# EAGLE board RN41-Panel-v15 (EAGLE 6.4)
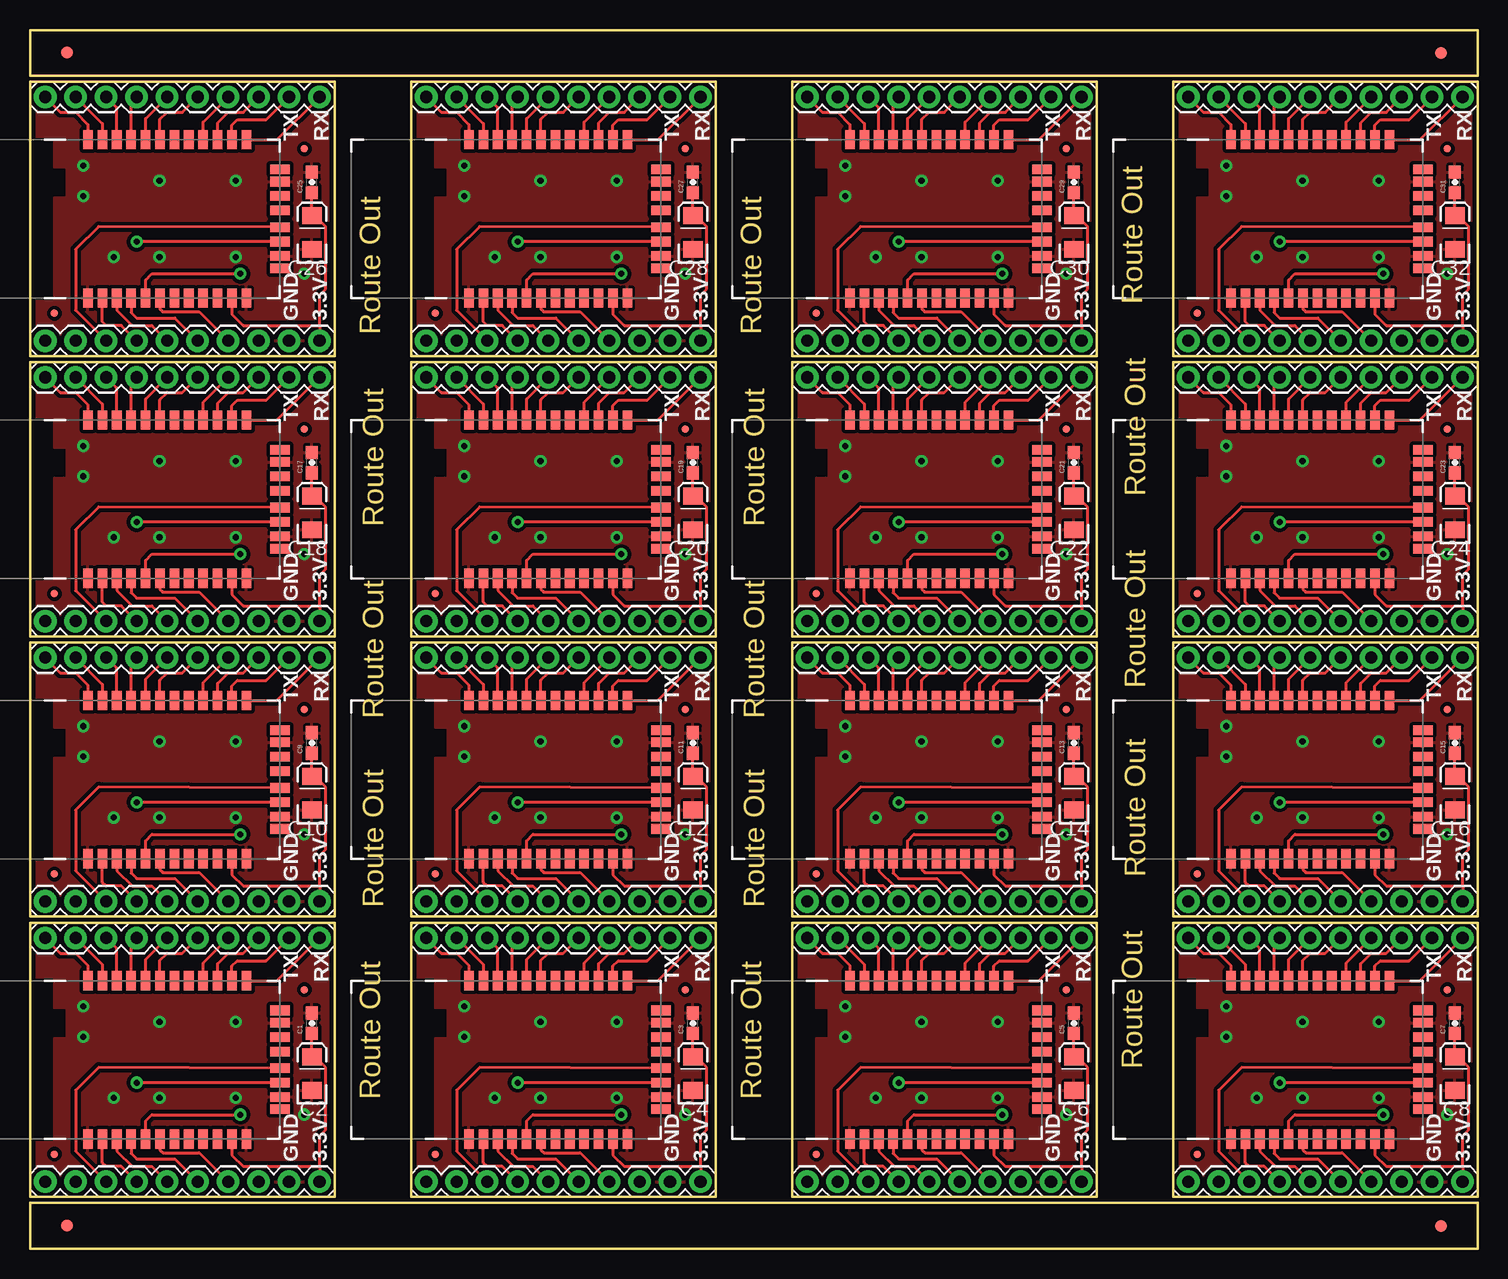
[diagram p0: board, top side]
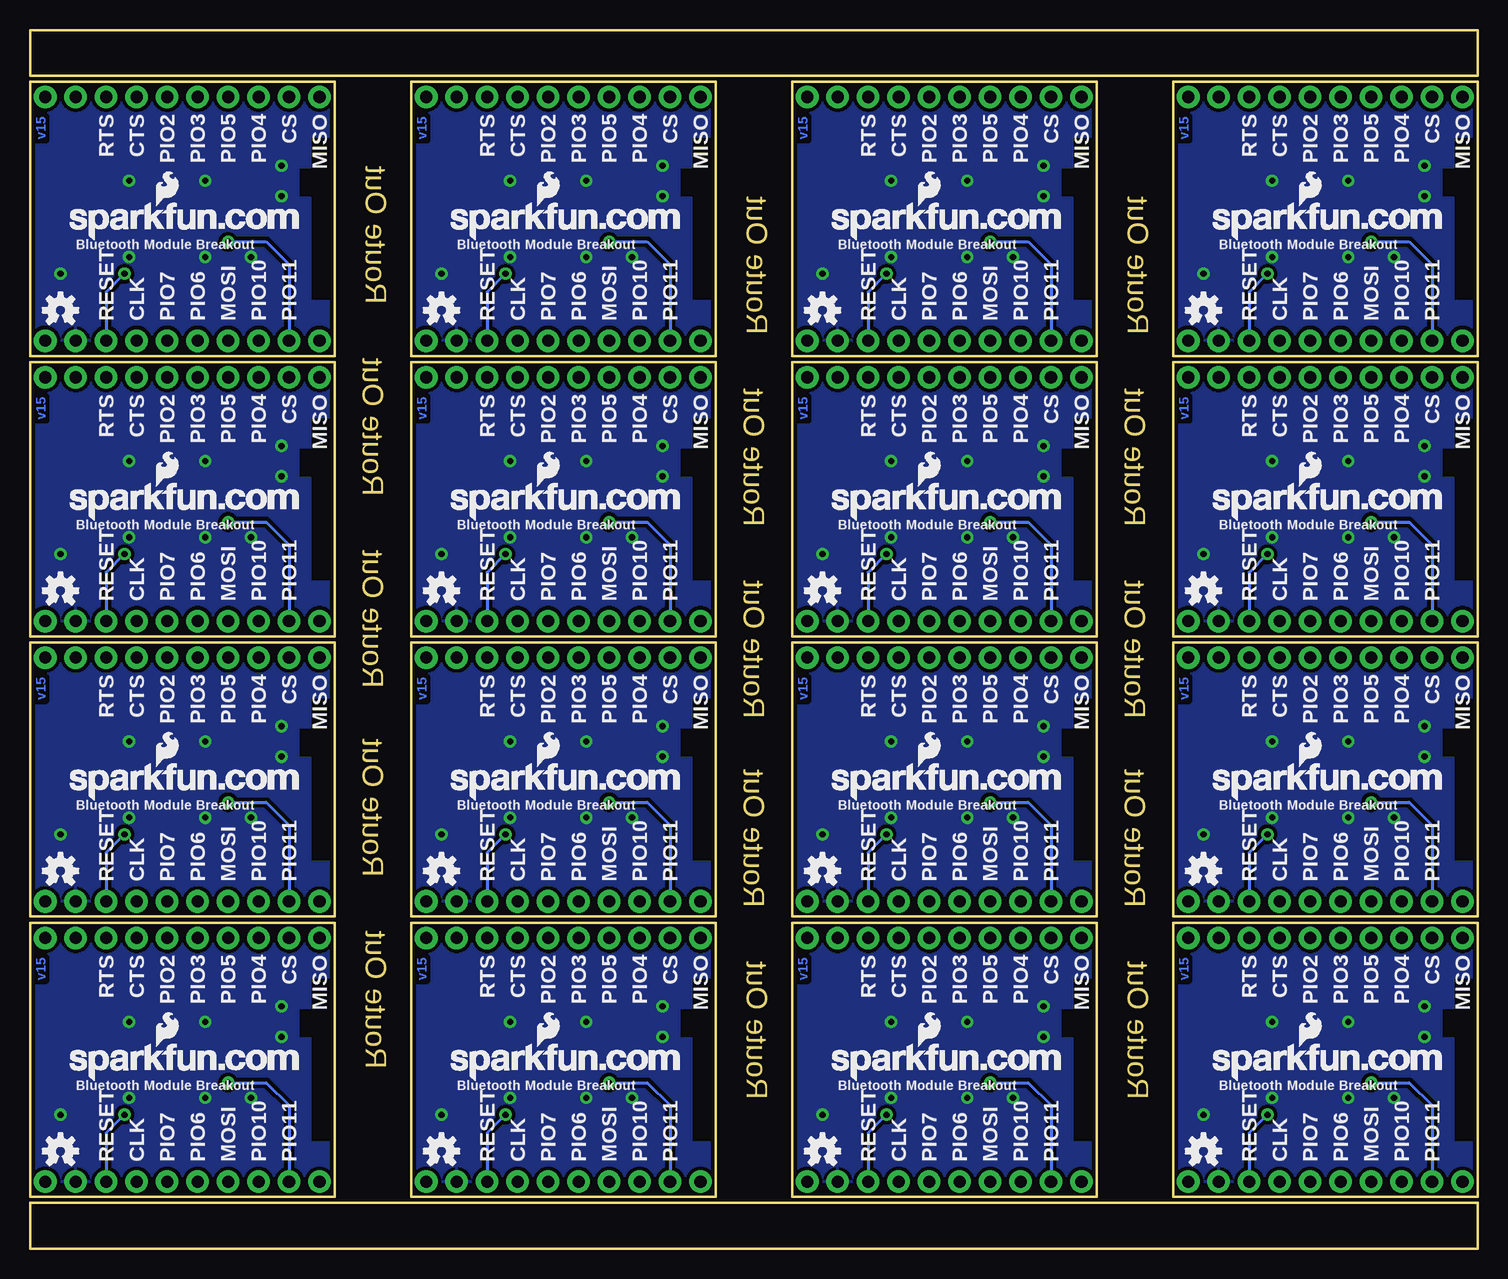
[diagram p1: board, bottom side, seen from below]

Size 120.65 x 101.6 mm. Coordinates in mm from the lower left corner, seen from the top.
Outline: 0,4.32 25.4,4.32 25.4,27.18 0,27.18 0,4.32
Outline: 31.75,4.32 57.15,4.32 57.15,27.18 31.75,27.18 31.75,4.32
Outline: 63.5,4.32 88.9,4.32 88.9,27.18 63.5,27.18 63.5,4.32
Outline: 95.25,4.32 120.65,4.32 120.65,27.18 95.25,27.18 95.25,4.32
Outline: 0,27.69 25.4,27.69 25.4,50.55 0,50.55 0,27.69
Outline: 31.75,27.69 57.15,27.69 57.15,50.55 31.75,50.55 31.75,27.69
Outline: 63.5,27.69 88.9,27.69 88.9,50.55 63.5,50.55 63.5,27.69
Outline: 95.25,27.69 120.65,27.69 120.65,50.55 95.25,50.55 95.25,27.69
Outline: 0,51.05 25.4,51.05 25.4,73.91 0,73.91 0,51.05
Outline: 31.75,51.05 57.15,51.05 57.15,73.91 31.75,73.91 31.75,51.05
Outline: 63.5,51.05 88.9,51.05 88.9,73.91 63.5,73.91 63.5,51.05
Outline: 95.25,51.05 120.65,51.05 120.65,73.91 95.25,73.91 95.25,51.05
Outline: 0,74.42 25.4,74.42 25.4,97.28 0,97.28 0,74.42
Outline: 31.75,74.42 57.15,74.42 57.15,97.28 31.75,97.28 31.75,74.42
Outline: 63.5,74.42 88.9,74.42 88.9,97.28 63.5,97.28 63.5,74.42
Outline: 95.25,74.42 120.65,74.42 120.65,97.28 95.25,97.28 95.25,74.42
Outline: 0,97.79 120.65,97.79 120.65,101.6 0,101.6 0,97.79
Outline: 0,0 120.65,0 120.65,3.81 0,3.81 0,0
Copper layers (1*16): Top 0.035mm / dielectric 1.5mm / Bottom 0.035mm
Design rules "SparkFun": minimum track width 8mil, minimum drill 20mil, track to track 8mil, track to pad 8mil, pad to pad 8mil, via to via 8mil, smd to smd 8mil, copper to edge 10mil, drill to drill 8mil, minimum pad ring 12mil, minimum via ring 10mil, stop-mask expansion 4mil, vias tented up to drill 25mil, thermal gap 10mil

## Footprints (pad centres in the part's own frame; a part is rotated, then mirrored left to right if it is on the bottom)
0603-CAP = smd 1.1 x 1: 1 -0.85,0; 2 0.85,0
EIA3216 = smd 1.4 x 1.6: A 1.4,0; C -1.4,0
FIDUCIAL-1X2 = smd 1 x 1: 1 0,0
MICRO-FIDUCIAL = smd 0.635 x 0.635: 1 0,0
1X10 = drill 1.016 pad 1.88: 1 0,0; 2 2.54,0; 3 5.08,0; 4 7.62,0; 5 10.16,0; 6 12.7,0; 7 15.24,0; 8 17.78,0; 9 20.32,0; 10 22.86,0
RN41 = smd 0.8 x 1.6: 1 -6.6,-6.6; 2 -5.4,-6.6; 3 -4.2,-6.6; 4 -3,-6.6; 5 -1.8,-6.6; 6 -0.6,-6.6; 7 0.6,-6.6; 8 1.8,-6.6; 9 3,-6.6; 10 4.2,-6.6; 11 5.4,-6.6; 12 6.6,-6.6; 13 6.6,6.6; 14 5.4,6.6; 15 4.2,6.6; 16 3,6.6; 17 1.8,6.6; 18 0.6,6.6; 19 -0.6,6.6; 20 -1.8,6.6; 21 -3,6.6; 22 -4.2,6.6; 23 -5.4,6.6; 24 -6.6,6.6 | smd 1.6 x 0.8: 28 9.4,3.1; 29 9.4,-3.1; 30 9.4,4.122; 31 9.4,1.9; 32 9.4,0.7; 33 9.4,-0.7; 34 9.4,-1.9; 35 9.4,-4.122

## Placement (x,y rotation side)
C1  0.1uF  [0603-CAP]  23.5,18.8 90 top
C2  10uF  [EIA3216]  23.5,14.61 90 top
C3  0.1uF  [0603-CAP]  55.24,18.8 90 top
C4  10uF  [EIA3216]  55.24,14.61 90 top
C5  0.1uF  [0603-CAP]  87,18.8 90 top
C6  10uF  [EIA3216]  87,14.61 90 top
C7  0.1uF  [0603-CAP]  118.75,18.8 90 top
C8  10uF  [EIA3216]  118.75,14.61 90 top
C9  0.1uF  [0603-CAP]  23.5,42.16 90 top
C10  10uF  [EIA3216]  23.5,37.97 90 top
C11  0.1uF  [0603-CAP]  55.24,42.16 90 top
C12  10uF  [EIA3216]  55.24,37.97 90 top
C13  0.1uF  [0603-CAP]  87,42.16 90 top
C14  10uF  [EIA3216]  87,37.97 90 top
C15  0.1uF  [0603-CAP]  118.75,42.16 90 top
C16  10uF  [EIA3216]  118.75,37.97 90 top
C17  0.1uF  [0603-CAP]  23.5,65.53 90 top
C18  10uF  [EIA3216]  23.5,61.34 90 top
C19  0.1uF  [0603-CAP]  55.24,65.53 90 top
C20  10uF  [EIA3216]  55.24,61.34 90 top
C21  0.1uF  [0603-CAP]  87,65.53 90 top
C22  10uF  [EIA3216]  87,61.34 90 top
C23  0.1uF  [0603-CAP]  118.75,65.53 90 top
C24  10uF  [EIA3216]  118.75,61.34 90 top
C25  0.1uF  [0603-CAP]  23.5,88.9 90 top
C26  10uF  [EIA3216]  23.5,84.71 90 top
C27  0.1uF  [0603-CAP]  55.24,88.9 90 top
C28  10uF  [EIA3216]  55.24,84.71 90 top
C29  0.1uF  [0603-CAP]  87,88.9 90 top
C30  10uF  [EIA3216]  87,84.71 90 top
C31  0.1uF  [0603-CAP]  118.75,88.9 90 top
C32  10uF  [EIA3216]  118.75,84.71 90 top
E$1  [FIDUCIAL-1X2]  117.58,99.67 270 top
E$2  [FIDUCIAL-1X2]  3.07,99.72 90 top
E$3  [FIDUCIAL-1X2]  3.07,1.93 90 top
E$4  [FIDUCIAL-1X2]  117.58,1.88 270 top
FID1  FIDUCIALUFIDUCIAL  [MICRO-FIDUCIAL]  22.86,21.59 0 top
FID2  FIDUCIALUFIDUCIAL  [MICRO-FIDUCIAL]  2.03,7.87 0 top
FID3  FIDUCIALUFIDUCIAL  [MICRO-FIDUCIAL]  54.61,21.59 0 top
FID4  FIDUCIALUFIDUCIAL  [MICRO-FIDUCIAL]  33.78,7.87 0 top
FID5  FIDUCIALUFIDUCIAL  [MICRO-FIDUCIAL]  86.36,21.59 0 top
FID6  FIDUCIALUFIDUCIAL  [MICRO-FIDUCIAL]  65.53,7.87 0 top
FID7  FIDUCIALUFIDUCIAL  [MICRO-FIDUCIAL]  118.11,21.59 0 top
FID8  FIDUCIALUFIDUCIAL  [MICRO-FIDUCIAL]  97.28,7.87 0 top
FID9  FIDUCIALUFIDUCIAL  [MICRO-FIDUCIAL]  22.86,44.96 0 top
FID10  FIDUCIALUFIDUCIAL  [MICRO-FIDUCIAL]  2.03,31.24 0 top
FID11  FIDUCIALUFIDUCIAL  [MICRO-FIDUCIAL]  54.61,44.96 0 top
FID12  FIDUCIALUFIDUCIAL  [MICRO-FIDUCIAL]  33.78,31.24 0 top
FID13  FIDUCIALUFIDUCIAL  [MICRO-FIDUCIAL]  86.36,44.96 0 top
FID14  FIDUCIALUFIDUCIAL  [MICRO-FIDUCIAL]  65.53,31.24 0 top
FID15  FIDUCIALUFIDUCIAL  [MICRO-FIDUCIAL]  118.11,44.96 0 top
FID16  FIDUCIALUFIDUCIAL  [MICRO-FIDUCIAL]  97.28,31.24 0 top
FID17  FIDUCIALUFIDUCIAL  [MICRO-FIDUCIAL]  22.86,68.33 0 top
FID18  FIDUCIALUFIDUCIAL  [MICRO-FIDUCIAL]  2.03,54.61 0 top
FID19  FIDUCIALUFIDUCIAL  [MICRO-FIDUCIAL]  54.61,68.33 0 top
FID20  FIDUCIALUFIDUCIAL  [MICRO-FIDUCIAL]  33.78,54.61 0 top
FID21  FIDUCIALUFIDUCIAL  [MICRO-FIDUCIAL]  86.36,68.33 0 top
FID22  FIDUCIALUFIDUCIAL  [MICRO-FIDUCIAL]  65.53,54.61 0 top
FID23  FIDUCIALUFIDUCIAL  [MICRO-FIDUCIAL]  118.11,68.33 0 top
FID24  FIDUCIALUFIDUCIAL  [MICRO-FIDUCIAL]  97.28,54.61 0 top
FID25  FIDUCIALUFIDUCIAL  [MICRO-FIDUCIAL]  22.86,91.69 0 top
FID26  FIDUCIALUFIDUCIAL  [MICRO-FIDUCIAL]  2.03,77.98 0 top
FID27  FIDUCIALUFIDUCIAL  [MICRO-FIDUCIAL]  54.61,91.69 0 top
FID28  FIDUCIALUFIDUCIAL  [MICRO-FIDUCIAL]  33.78,77.98 0 top
FID29  FIDUCIALUFIDUCIAL  [MICRO-FIDUCIAL]  86.36,91.69 0 top
FID30  FIDUCIALUFIDUCIAL  [MICRO-FIDUCIAL]  65.53,77.98 0 top
FID31  FIDUCIALUFIDUCIAL  [MICRO-FIDUCIAL]  118.11,91.69 0 top
FID32  FIDUCIALUFIDUCIAL  [MICRO-FIDUCIAL]  97.28,77.98 0 top
JP1  [1X10]  24.13,5.59 180 top
JP2  [1X10]  1.27,25.91 0 top
JP3  [1X10]  55.88,5.59 180 top
JP4  [1X10]  33.02,25.91 0 top
JP5  [1X10]  87.63,5.59 180 top
JP6  [1X10]  64.77,25.91 0 top
JP7  [1X10]  119.38,5.59 180 top
JP8  [1X10]  96.52,25.91 0 top
JP9  [1X10]  24.13,28.96 180 top
JP10  [1X10]  1.27,49.28 0 top
JP11  [1X10]  55.88,28.96 180 top
JP12  [1X10]  33.02,49.28 0 top
JP13  [1X10]  87.63,28.96 180 top
JP14  [1X10]  64.77,49.28 0 top
JP15  [1X10]  119.38,28.96 180 top
JP16  [1X10]  96.52,49.28 0 top
JP17  [1X10]  24.13,52.32 180 top
JP18  [1X10]  1.27,72.64 0 top
JP19  [1X10]  55.88,52.32 180 top
JP20  [1X10]  33.02,72.64 0 top
JP21  [1X10]  87.63,52.32 180 top
JP22  [1X10]  64.77,72.64 0 top
JP23  [1X10]  119.38,52.32 180 top
JP24  [1X10]  96.52,72.64 0 top
JP25  [1X10]  24.13,75.69 180 top
JP26  [1X10]  1.27,96.01 0 top
JP27  [1X10]  55.88,75.69 180 top
JP28  [1X10]  33.02,96.01 0 top
JP29  [1X10]  87.63,75.69 180 top
JP30  [1X10]  64.77,96.01 0 top
JP31  [1X10]  119.38,75.69 180 top
JP32  [1X10]  96.52,96.01 0 top
LOGO1  OSHW-LOGOS  [OSHW-LOGO-S]  22.86,8.13 0 bottom
LOGO2  OSHW-LOGOS  [OSHW-LOGO-S]  54.61,8.13 0 bottom
LOGO3  OSHW-LOGOS  [OSHW-LOGO-S]  86.36,8.13 0 bottom
LOGO4  OSHW-LOGOS  [OSHW-LOGO-S]  118.11,8.13 0 bottom
LOGO5  OSHW-LOGOS  [OSHW-LOGO-S]  22.86,31.5 0 bottom
LOGO6  OSHW-LOGOS  [OSHW-LOGO-S]  54.61,31.5 0 bottom
LOGO7  OSHW-LOGOS  [OSHW-LOGO-S]  86.36,31.5 0 bottom
LOGO8  OSHW-LOGOS  [OSHW-LOGO-S]  118.11,31.5 0 bottom
LOGO9  OSHW-LOGOS  [OSHW-LOGO-S]  22.86,54.86 0 bottom
LOGO10  OSHW-LOGOS  [OSHW-LOGO-S]  54.61,54.86 0 bottom
LOGO11  OSHW-LOGOS  [OSHW-LOGO-S]  86.36,54.86 0 bottom
LOGO12  OSHW-LOGOS  [OSHW-LOGO-S]  118.11,54.86 0 bottom
LOGO13  OSHW-LOGOS  [OSHW-LOGO-S]  22.86,78.23 0 bottom
LOGO14  OSHW-LOGOS  [OSHW-LOGO-S]  54.61,78.23 0 bottom
LOGO15  OSHW-LOGOS  [OSHW-LOGO-S]  86.36,78.23 0 bottom
LOGO16  OSHW-LOGOS  [OSHW-LOGO-S]  118.11,78.23 0 bottom
U1  BLUETOOTH-RN41"  [RN41]  11.43,15.75 0 top
U2  BLUETOOTH-RN41"  [RN41]  43.18,15.75 0 top
U3  BLUETOOTH-RN41"  [RN41]  74.93,15.75 0 top
U4  BLUETOOTH-RN41"  [RN41]  106.68,15.75 0 top
U5  BLUETOOTH-RN41"  [RN41]  11.43,39.12 0 top
U6  BLUETOOTH-RN41"  [RN41]  43.18,39.12 0 top
U7  BLUETOOTH-RN41"  [RN41]  74.93,39.12 0 top
U8  BLUETOOTH-RN41"  [RN41]  106.68,39.12 0 top
U9  BLUETOOTH-RN41"  [RN41]  11.43,62.48 0 top
U10  BLUETOOTH-RN41"  [RN41]  43.18,62.48 0 top
U11  BLUETOOTH-RN41"  [RN41]  74.93,62.48 0 top
U12  BLUETOOTH-RN41"  [RN41]  106.68,62.48 0 top
U13  BLUETOOTH-RN41"  [RN41]  11.43,85.85 0 top
U14  BLUETOOTH-RN41"  [RN41]  43.18,85.85 0 top
U15  BLUETOOTH-RN41"  [RN41]  74.93,85.85 0 top
U16  BLUETOOTH-RN41"  [RN41]  106.68,85.85 0 top
U$1  LOGO-SFENEW  [SFE-NEW-WEBLOGO]  22.1,13.97 0 bottom
U$2  LOGO-SFENEW  [SFE-NEW-WEBLOGO]  53.85,13.97 0 bottom
U$3  LOGO-SFENEW  [SFE-NEW-WEBLOGO]  85.6,13.97 0 bottom
U$4  LOGO-SFENEW  [SFE-NEW-WEBLOGO]  117.35,13.97 0 bottom
U$5  LOGO-SFENEW  [SFE-NEW-WEBLOGO]  22.1,37.34 0 bottom
U$6  LOGO-SFENEW  [SFE-NEW-WEBLOGO]  53.85,37.34 0 bottom
U$7  LOGO-SFENEW  [SFE-NEW-WEBLOGO]  85.6,37.34 0 bottom
U$8  LOGO-SFENEW  [SFE-NEW-WEBLOGO]  117.35,37.34 0 bottom
U$9  LOGO-SFENEW  [SFE-NEW-WEBLOGO]  22.1,60.71 0 bottom
U$10  LOGO-SFENEW  [SFE-NEW-WEBLOGO]  53.85,60.71 0 bottom
U$11  LOGO-SFENEW  [SFE-NEW-WEBLOGO]  85.6,60.71 0 bottom
U$12  LOGO-SFENEW  [SFE-NEW-WEBLOGO]  117.35,60.71 0 bottom
U$13  LOGO-SFENEW  [SFE-NEW-WEBLOGO]  22.1,84.07 0 bottom
U$14  LOGO-SFENEW  [SFE-NEW-WEBLOGO]  53.85,84.07 0 bottom
U$15  LOGO-SFENEW  [SFE-NEW-WEBLOGO]  85.6,84.07 0 bottom
U$16  LOGO-SFENEW  [SFE-NEW-WEBLOGO]  117.35,84.07 0 bottom

## Library data of the parts
C1-C32 E$1-E$4 JP1-JP32 U$1-U$16 = SparkFun
FID1-FID32 LOGO1-LOGO16 = SparkFun-Aesthetics
U1-U16 = SparkFun-RF

## Nets
GND: C1.2 C2.C JP1.2 U1.1 U1.12 U1.28 U1.29
GND1: C3.2 C4.C JP3.2 U2.1 U2.12 U2.28 U2.29
GND2: C5.2 C6.C JP5.2 U3.1 U3.12 U3.28 U3.29
GND3: C7.2 C8.C JP7.2 U4.1 U4.12 U4.28 U4.29
GND4: C9.2 C10.C JP9.2 U5.1 U5.12 U5.28 U5.29
GND5: C11.2 C12.C JP11.2 U6.1 U6.12 U6.28 U6.29
GND6: C13.2 C14.C JP13.2 U7.1 U7.12 U7.28 U7.29
GND7: C15.2 C16.C JP15.2 U8.1 U8.12 U8.28 U8.29
GND8: C17.2 C18.C JP17.2 U9.1 U9.12 U9.28 U9.29
GND9: C19.2 C20.C JP19.2 U10.1 U10.12 U10.28 U10.29
GND10: C21.2 C22.C JP21.2 U11.1 U11.12 U11.28 U11.29
GND11: C23.2 C24.C JP23.2 U12.1 U12.12 U12.28 U12.29
GND12: C25.2 C26.C JP25.2 U13.1 U13.12 U13.28 U13.29
GND13: C27.2 C28.C JP27.2 U14.1 U14.12 U14.28 U14.29
GND14: C29.2 C30.C JP29.2 U15.1 U15.12 U15.28 U15.29
GND15: C31.2 C32.C JP31.2 U16.1 U16.12 U16.28 U16.29
PIO1: JP4.6 U2.19
PIO2: JP2.6 U1.19
PIO3: JP2.5 U1.20
PIO4: JP2.3 U1.22
PIO5: JP2.4 U1.21
PIO6: JP1.6 U1.3
PIO7: JP1.5 U1.4
PIO8: JP4.5 U2.20
PIO9: JP4.3 U2.22
PIO10: JP1.8 U1.33
PIO11: JP1.9 U1.34
PIO12: JP4.4 U2.21
PIO13: JP3.6 U2.3
PIO14: JP3.5 U2.4
PIO15: JP3.8 U2.33
PIO16: JP3.9 U2.34
PIO17: JP6.6 U3.19
PIO18: JP6.5 U3.20
PIO19: JP6.3 U3.22
PIO20: JP6.4 U3.21
PIO21: JP5.6 U3.3
PIO22: JP5.5 U3.4
PIO23: JP5.8 U3.33
PIO24: JP5.9 U3.34
PIO25: JP8.6 U4.19
PIO26: JP8.5 U4.20
PIO27: JP8.3 U4.22
PIO28: JP8.4 U4.21
PIO29: JP7.6 U4.3
PIO30: JP7.5 U4.4
PIO31: JP7.8 U4.33
PIO32: JP7.9 U4.34
PIO33: JP10.6 U5.19
PIO34: JP10.5 U5.20
PIO35: JP10.3 U5.22
PIO36: JP10.4 U5.21
PIO37: JP9.6 U5.3
PIO38: JP9.5 U5.4
PIO39: JP9.8 U5.33
PIO40: JP9.9 U5.34
PIO41: JP12.6 U6.19
PIO42: JP12.5 U6.20
PIO43: JP12.3 U6.22
PIO44: JP12.4 U6.21
PIO45: JP11.6 U6.3
PIO46: JP11.5 U6.4
PIO47: JP11.8 U6.33
PIO48: JP11.9 U6.34
PIO49: JP14.6 U7.19
PIO50: JP14.5 U7.20
PIO51: JP14.3 U7.22
PIO52: JP14.4 U7.21
PIO53: JP13.6 U7.3
PIO54: JP13.5 U7.4
PIO55: JP13.8 U7.33
PIO56: JP13.9 U7.34
PIO57: JP16.6 U8.19
PIO58: JP16.5 U8.20
PIO59: JP16.3 U8.22
PIO60: JP16.4 U8.21
PIO61: JP15.6 U8.3
PIO62: JP15.5 U8.4
PIO63: JP15.8 U8.33
PIO64: JP15.9 U8.34
PIO65: JP18.6 U9.19
PIO66: JP18.5 U9.20
PIO67: JP18.3 U9.22
PIO68: JP18.4 U9.21
PIO69: JP17.6 U9.3
PIO70: JP17.5 U9.4
PIO71: JP17.8 U9.33
PIO72: JP17.9 U9.34
PIO73: JP20.6 U10.19
PIO74: JP20.5 U10.20
PIO75: JP20.3 U10.22
PIO76: JP20.4 U10.21
PIO77: JP19.6 U10.3
PIO78: JP19.5 U10.4
PIO79: JP19.8 U10.33
PIO80: JP19.9 U10.34
PIO81: JP22.6 U11.19
PIO82: JP22.5 U11.20
PIO83: JP22.3 U11.22
PIO84: JP22.4 U11.21
PIO85: JP21.6 U11.3
PIO86: JP21.5 U11.4
PIO87: JP21.8 U11.33
PIO88: JP21.9 U11.34
PIO89: JP24.6 U12.19
PIO90: JP24.5 U12.20
PIO91: JP24.3 U12.22
PIO92: JP24.4 U12.21
PIO93: JP23.6 U12.3
PIO94: JP23.5 U12.4
PIO95: JP23.8 U12.33
PIO96: JP23.9 U12.34
PIO97: JP26.6 U13.19
PIO98: JP26.5 U13.20
PIO99: JP26.3 U13.22
PIO100: JP26.4 U13.21
PIO101: JP25.6 U13.3
PIO102: JP25.5 U13.4
PIO103: JP25.8 U13.33
PIO104: JP25.9 U13.34
PIO105: JP28.6 U14.19
PIO106: JP28.5 U14.20
PIO107: JP28.3 U14.22
PIO108: JP28.4 U14.21
PIO109: JP27.6 U14.3
PIO110: JP27.5 U14.4
PIO111: JP27.8 U14.33
PIO112: JP27.9 U14.34
PIO113: JP30.6 U15.19
PIO114: JP30.5 U15.20
PIO115: JP30.3 U15.22
PIO116: JP30.4 U15.21
PIO117: JP29.6 U15.3
PIO118: JP29.5 U15.4
PIO119: JP29.8 U15.33
PIO120: JP29.9 U15.34
PIO121: JP32.6 U16.19
PIO122: JP32.5 U16.20
PIO123: JP32.3 U16.22
PIO124: JP32.4 U16.21
PIO125: JP31.6 U16.3
PIO126: JP31.5 U16.4
PIO127: JP31.8 U16.33
PIO128: JP31.9 U16.34
RESET: JP1.3 U1.5
RESET1: JP3.3 U2.5
RESET2: JP5.3 U3.5
RESET3: JP7.3 U4.5
RESET4: JP9.3 U5.5
RESET5: JP11.3 U6.5
RESET6: JP13.3 U7.5
RESET7: JP15.3 U8.5
RESET8: JP17.3 U9.5
RESET9: JP19.3 U10.5
RESET10: JP21.3 U11.5
RESET11: JP23.3 U12.5
RESET12: JP25.3 U13.5
RESET13: JP27.3 U14.5
RESET14: JP29.3 U15.5
RESET15: JP31.3 U16.5
SPICLK: JP1.4 U1.6
SPICLK1: JP3.4 U2.6
SPICLK2: JP5.4 U3.6
SPICLK3: JP7.4 U4.6
SPICLK4: JP9.4 U5.6
SPICLK5: JP11.4 U6.6
SPICLK6: JP13.4 U7.6
SPICLK7: JP15.4 U8.6
SPICLK8: JP17.4 U9.6
SPICLK9: JP19.4 U10.6
SPICLK10: JP21.4 U11.6
SPICLK11: JP23.4 U12.6
SPICLK12: JP25.4 U13.6
SPICLK13: JP27.4 U14.6
SPICLK14: JP29.4 U15.6
SPICLK15: JP31.4 U16.6
SPICSB: JP2.2 U1.23
SPICSB1: JP4.2 U2.23
SPICSB2: JP6.2 U3.23
SPICSB3: JP8.2 U4.23
SPICSB4: JP10.2 U5.23
SPICSB5: JP12.2 U6.23
SPICSB6: JP14.2 U7.23
SPICSB7: JP16.2 U8.23
SPICSB8: JP18.2 U9.23
SPICSB9: JP20.2 U10.23
SPICSB10: JP22.2 U11.23
SPICSB11: JP24.2 U12.23
SPICSB12: JP26.2 U13.23
SPICSB13: JP28.2 U14.23
SPICSB14: JP30.2 U15.23
SPICSB15: JP32.2 U16.23
SPIMISO: JP2.1 U1.24
SPIMISO1: JP4.1 U2.24
SPIMISO2: JP6.1 U3.24
SPIMISO3: JP8.1 U4.24
SPIMISO4: JP10.1 U5.24
SPIMISO5: JP12.1 U6.24
SPIMISO6: JP14.1 U7.24
SPIMISO7: JP16.1 U8.24
SPIMISO8: JP18.1 U9.24
SPIMISO9: JP20.1 U10.24
SPIMISO10: JP22.1 U11.24
SPIMISO11: JP24.1 U12.24
SPIMISO12: JP26.1 U13.24
SPIMISO13: JP28.1 U14.24
SPIMISO14: JP30.1 U15.24
SPIMISO15: JP32.1 U16.24
SPIMOSI: JP1.7 U1.2
SPIMOSI1: JP3.7 U2.2
SPIMOSI2: JP5.7 U3.2
SPIMOSI3: JP7.7 U4.2
SPIMOSI4: JP9.7 U5.2
SPIMOSI5: JP11.7 U6.2
SPIMOSI6: JP13.7 U7.2
SPIMOSI7: JP15.7 U8.2
SPIMOSI8: JP17.7 U9.2
SPIMOSI9: JP19.7 U10.2
SPIMOSI10: JP21.7 U11.2
SPIMOSI11: JP23.7 U12.2
SPIMOSI12: JP25.7 U13.2
SPIMOSI13: JP27.7 U14.2
SPIMOSI14: JP29.7 U15.2
SPIMOSI15: JP31.7 U16.2
UARTCTS: JP2.7 U1.16
UARTCTS1: JP4.7 U2.16
UARTCTS2: JP6.7 U3.16
UARTCTS3: JP8.7 U4.16
UARTCTS4: JP10.7 U5.16
UARTCTS5: JP12.7 U6.16
UARTCTS6: JP14.7 U7.16
UARTCTS7: JP16.7 U8.16
UARTCTS8: JP18.7 U9.16
UARTCTS9: JP20.7 U10.16
UARTCTS10: JP22.7 U11.16
UARTCTS11: JP24.7 U12.16
UARTCTS12: JP26.7 U13.16
UARTCTS13: JP28.7 U14.16
UARTCTS14: JP30.7 U15.16
UARTCTS15: JP32.7 U16.16
UARTRTS: JP2.8 U1.15
UARTRTS1: JP4.8 U2.15
UARTRTS2: JP6.8 U3.15
UARTRTS3: JP8.8 U4.15
UARTRTS4: JP10.8 U5.15
UARTRTS5: JP12.8 U6.15
UARTRTS6: JP14.8 U7.15
UARTRTS7: JP16.8 U8.15
UARTRTS8: JP18.8 U9.15
UARTRTS9: JP20.8 U10.15
UARTRTS10: JP22.8 U11.15
UARTRTS11: JP24.8 U12.15
UARTRTS12: JP26.8 U13.15
UARTRTS13: JP28.8 U14.15
UARTRTS14: JP30.8 U15.15
UARTRTS15: JP32.8 U16.15
UARTRX: JP2.10 U1.13
UARTRX1: JP4.10 U2.13
UARTRX2: JP6.10 U3.13
UARTRX3: JP8.10 U4.13
UARTRX4: JP10.10 U5.13
UARTRX5: JP12.10 U6.13
UARTRX6: JP14.10 U7.13
UARTRX7: JP16.10 U8.13
UARTRX8: JP18.10 U9.13
UARTRX9: JP20.10 U10.13
UARTRX10: JP22.10 U11.13
UARTRX11: JP24.10 U12.13
UARTRX12: JP26.10 U13.13
UARTRX13: JP28.10 U14.13
UARTRX14: JP30.10 U15.13
UARTRX15: JP32.10 U16.13
UARTTX: JP2.9 U1.14
UARTTX1: JP4.9 U2.14
UARTTX2: JP6.9 U3.14
UARTTX3: JP8.9 U4.14
UARTTX4: JP10.9 U5.14
UARTTX5: JP12.9 U6.14
UARTTX6: JP14.9 U7.14
UARTTX7: JP16.9 U8.14
UARTTX8: JP18.9 U9.14
UARTTX9: JP20.9 U10.14
UARTTX10: JP22.9 U11.14
UARTTX11: JP24.9 U12.14
UARTTX12: JP26.9 U13.14
UARTTX13: JP28.9 U14.14
UARTTX14: JP30.9 U15.14
UARTTX15: JP32.9 U16.14
VCC: C1.1 C2.A JP1.1 U1.11
VCC1: C3.1 C4.A JP3.1 U2.11
VCC2: C5.1 C6.A JP5.1 U3.11
VCC3: C7.1 C8.A JP7.1 U4.11
VCC4: C9.1 C10.A JP9.1 U5.11
VCC5: C11.1 C12.A JP11.1 U6.11
VCC6: C13.1 C14.A JP13.1 U7.11
VCC7: C15.1 C16.A JP15.1 U8.11
VCC8: C17.1 C18.A JP17.1 U9.11
VCC9: C19.1 C20.A JP19.1 U10.11
VCC10: C21.1 C22.A JP21.1 U11.11
VCC11: C23.1 C24.A JP23.1 U12.11
VCC12: C25.1 C26.A JP25.1 U13.11
VCC13: C27.1 C28.A JP27.1 U14.11
VCC14: C29.1 C30.A JP29.1 U15.11
VCC15: C31.1 C32.A JP31.1 U16.11

## Tracks (layer width: path | path; a pad name or v marks a point on that pad's centre or on a via)
GND  (via drill 0.51)
  other vias: 22.86,11.18 4.45,20.19 4.45,17.65 10.79,18.92 17.14,18.92 6.99,12.57 10.79,12.57 17.14,12.57
  pour Bottom (isolate 0.305): 0,27.18 0,22.61 2.03,22.61 2.03,20.07 3.05,20.07 3.05,17.53 2.03,17.53 2.03,8.89 0,8.89 0,4.32 25.4,4.32 25.4,27.18
  pour Top (isolate 0.305): 0,27.18 0,22.61 2.03,22.61 2.03,20.07 3.05,20.07 3.05,17.53 2.03,17.53 2.03,8.89 0,8.89 0,4.32 25.4,4.32 25.4,27.18
GND1  (via drill 0.51)
  other vias: 54.61,11.18 36.2,20.19 36.2,17.65 42.55,18.92 48.9,18.92 38.73,12.57 42.55,12.57 48.9,12.57
  pour Bottom (isolate 0.305): 31.75,27.18 31.75,22.61 33.78,22.61 33.78,20.07 34.8,20.07 34.8,17.53 33.78,17.53 33.78,8.89 31.75,8.89 31.75,4.32 57.15,4.32 57.15,27.18
  pour Top (isolate 0.305): 31.75,27.18 31.75,22.61 33.78,22.61 33.78,20.07 34.8,20.07 34.8,17.53 33.78,17.53 33.78,8.89 31.75,8.89 31.75,4.32 57.15,4.32 57.15,27.18
GND2  (via drill 0.51)
  other vias: 86.36,11.18 67.94,20.19 67.94,17.65 74.3,18.92 80.64,18.92 70.48,12.57 74.3,12.57 80.64,12.57
  pour Bottom (isolate 0.305): 63.5,27.18 63.5,22.61 65.53,22.61 65.53,20.07 66.55,20.07 66.55,17.53 65.53,17.53 65.53,8.89 63.5,8.89 63.5,4.32 88.9,4.32 88.9,27.18
  pour Top (isolate 0.305): 63.5,27.18 63.5,22.61 65.53,22.61 65.53,20.07 66.55,20.07 66.55,17.53 65.53,17.53 65.53,8.89 63.5,8.89 63.5,4.32 88.9,4.32 88.9,27.18
GND3  (via drill 0.51)
  other vias: 118.11,11.18 99.69,20.19 99.69,17.65 106.05,18.92 112.39,18.92 102.23,12.57 106.05,12.57 112.39,12.57
  pour Bottom (isolate 0.305): 95.25,27.18 95.25,22.61 97.28,22.61 97.28,20.07 98.3,20.07 98.3,17.53 97.28,17.53 97.28,8.89 95.25,8.89 95.25,4.32 120.65,4.32 120.65,27.18
  pour Top (isolate 0.305): 95.25,27.18 95.25,22.61 97.28,22.61 97.28,20.07 98.3,20.07 98.3,17.53 97.28,17.53 97.28,8.89 95.25,8.89 95.25,4.32 120.65,4.32 120.65,27.18
GND4  (via drill 0.51)
  other vias: 22.86,34.54 4.45,43.56 4.45,41.02 10.79,42.29 17.14,42.29 6.99,35.94 10.79,35.94 17.14,35.94
  pour Bottom (isolate 0.305): 0,50.55 0,45.97 2.03,45.97 2.03,43.43 3.05,43.43 3.05,40.89 2.03,40.89 2.03,32.26 0,32.26 0,27.69 25.4,27.69 25.4,50.55
  pour Top (isolate 0.305): 0,50.55 0,45.97 2.03,45.97 2.03,43.43 3.05,43.43 3.05,40.89 2.03,40.89 2.03,32.26 0,32.26 0,27.69 25.4,27.69 25.4,50.55
GND5  (via drill 0.51)
  other vias: 54.61,34.54 36.2,43.56 36.2,41.02 42.55,42.29 48.9,42.29 38.73,35.94 42.55,35.94 48.9,35.94
  pour Bottom (isolate 0.305): 31.75,50.55 31.75,45.97 33.78,45.97 33.78,43.43 34.8,43.43 34.8,40.89 33.78,40.89 33.78,32.26 31.75,32.26 31.75,27.69 57.15,27.69 57.15,50.55
  pour Top (isolate 0.305): 31.75,50.55 31.75,45.97 33.78,45.97 33.78,43.43 34.8,43.43 34.8,40.89 33.78,40.89 33.78,32.26 31.75,32.26 31.75,27.69 57.15,27.69 57.15,50.55
GND6  (via drill 0.51)
  other vias: 86.36,34.54 67.94,43.56 67.94,41.02 74.3,42.29 80.64,42.29 70.48,35.94 74.3,35.94 80.64,35.94
  pour Bottom (isolate 0.305): 63.5,50.55 63.5,45.97 65.53,45.97 65.53,43.43 66.55,43.43 66.55,40.89 65.53,40.89 65.53,32.26 63.5,32.26 63.5,27.69 88.9,27.69 88.9,50.55
  pour Top (isolate 0.305): 63.5,50.55 63.5,45.97 65.53,45.97 65.53,43.43 66.55,43.43 66.55,40.89 65.53,40.89 65.53,32.26 63.5,32.26 63.5,27.69 88.9,27.69 88.9,50.55
GND7  (via drill 0.51)
  other vias: 118.11,34.54 99.69,43.56 99.69,41.02 106.05,42.29 112.39,42.29 102.23,35.94 106.05,35.94 112.39,35.94
  pour Bottom (isolate 0.305): 95.25,50.55 95.25,45.97 97.28,45.97 97.28,43.43 98.3,43.43 98.3,40.89 97.28,40.89 97.28,32.26 95.25,32.26 95.25,27.69 120.65,27.69 120.65,50.55
  pour Top (isolate 0.305): 95.25,50.55 95.25,45.97 97.28,45.97 97.28,43.43 98.3,43.43 98.3,40.89 97.28,40.89 97.28,32.26 95.25,32.26 95.25,27.69 120.65,27.69 120.65,50.55
GND8  (via drill 0.51)
  other vias: 22.86,57.91 4.45,66.93 4.45,64.39 10.79,65.66 17.14,65.66 6.99,59.31 10.79,59.31 17.14,59.31
  pour Bottom (isolate 0.305): 0,73.91 0,69.34 2.03,69.34 2.03,66.8 3.05,66.8 3.05,64.26 2.03,64.26 2.03,55.63 0,55.63 0,51.05 25.4,51.05 25.4,73.91
  pour Top (isolate 0.305): 0,73.91 0,69.34 2.03,69.34 2.03,66.8 3.05,66.8 3.05,64.26 2.03,64.26 2.03,55.63 0,55.63 0,51.05 25.4,51.05 25.4,73.91
GND9  (via drill 0.51)
  other vias: 54.61,57.91 36.2,66.93 36.2,64.39 42.55,65.66 48.9,65.66 38.73,59.31 42.55,59.31 48.9,59.31
  pour Bottom (isolate 0.305): 31.75,73.91 31.75,69.34 33.78,69.34 33.78,66.8 34.8,66.8 34.8,64.26 33.78,64.26 33.78,55.63 31.75,55.63 31.75,51.05 57.15,51.05 57.15,73.91
  pour Top (isolate 0.305): 31.75,73.91 31.75,69.34 33.78,69.34 33.78,66.8 34.8,66.8 34.8,64.26 33.78,64.26 33.78,55.63 31.75,55.63 31.75,51.05 57.15,51.05 57.15,73.91
GND10  (via drill 0.51)
  other vias: 86.36,57.91 67.94,66.93 67.94,64.39 74.3,65.66 80.64,65.66 70.48,59.31 74.3,59.31 80.64,59.31
  pour Bottom (isolate 0.305): 63.5,73.91 63.5,69.34 65.53,69.34 65.53,66.8 66.55,66.8 66.55,64.26 65.53,64.26 65.53,55.63 63.5,55.63 63.5,51.05 88.9,51.05 88.9,73.91
  pour Top (isolate 0.305): 63.5,73.91 63.5,69.34 65.53,69.34 65.53,66.8 66.55,66.8 66.55,64.26 65.53,64.26 65.53,55.63 63.5,55.63 63.5,51.05 88.9,51.05 88.9,73.91
GND11  (via drill 0.51)
  other vias: 118.11,57.91 99.69,66.93 99.69,64.39 106.05,65.66 112.39,65.66 102.23,59.31 106.05,59.31 112.39,59.31
  pour Bottom (isolate 0.305): 95.25,73.91 95.25,69.34 97.28,69.34 97.28,66.8 98.3,66.8 98.3,64.26 97.28,64.26 97.28,55.63 95.25,55.63 95.25,51.05 120.65,51.05 120.65,73.91
  pour Top (isolate 0.305): 95.25,73.91 95.25,69.34 97.28,69.34 97.28,66.8 98.3,66.8 98.3,64.26 97.28,64.26 97.28,55.63 95.25,55.63 95.25,51.05 120.65,51.05 120.65,73.91
GND12  (via drill 0.51)
  other vias: 22.86,81.28 4.45,90.3 4.45,87.76 10.79,89.03 17.14,89.03 6.99,82.68 10.79,82.68 17.14,82.68
  pour Bottom (isolate 0.305): 0,97.28 0,92.71 2.03,92.71 2.03,90.17 3.05,90.17 3.05,87.63 2.03,87.63 2.03,78.99 0,78.99 0,74.42 25.4,74.42 25.4,97.28
  pour Top (isolate 0.305): 0,97.28 0,92.71 2.03,92.71 2.03,90.17 3.05,90.17 3.05,87.63 2.03,87.63 2.03,78.99 0,78.99 0,74.42 25.4,74.42 25.4,97.28
GND13  (via drill 0.51)
  other vias: 54.61,81.28 36.2,90.3 36.2,87.76 42.55,89.03 48.9,89.03 38.73,82.68 42.55,82.68 48.9,82.68
  pour Bottom (isolate 0.305): 31.75,97.28 31.75,92.71 33.78,92.71 33.78,90.17 34.8,90.17 34.8,87.63 33.78,87.63 33.78,78.99 31.75,78.99 31.75,74.42 57.15,74.42 57.15,97.28
  pour Top (isolate 0.305): 31.75,97.28 31.75,92.71 33.78,92.71 33.78,90.17 34.8,90.17 34.8,87.63 33.78,87.63 33.78,78.99 31.75,78.99 31.75,74.42 57.15,74.42 57.15,97.28
GND14  (via drill 0.51)
  other vias: 86.36,81.28 67.94,90.3 67.94,87.76 74.3,89.03 80.64,89.03 70.48,82.68 74.3,82.68 80.64,82.68
  pour Bottom (isolate 0.305): 63.5,97.28 63.5,92.71 65.53,92.71 65.53,90.17 66.55,90.17 66.55,87.63 65.53,87.63 65.53,78.99 63.5,78.99 63.5,74.42 88.9,74.42 88.9,97.28
  pour Top (isolate 0.305): 63.5,97.28 63.5,92.71 65.53,92.71 65.53,90.17 66.55,90.17 66.55,87.63 65.53,87.63 65.53,78.99 63.5,78.99 63.5,74.42 88.9,74.42 88.9,97.28
GND15  (via drill 0.51)
  other vias: 118.11,81.28 99.69,90.3 99.69,87.76 106.05,89.03 112.39,89.03 102.23,82.68 106.05,82.68 112.39,82.68
  pour Bottom (isolate 0.305): 95.25,97.28 95.25,92.71 97.28,92.71 97.28,90.17 98.3,90.17 98.3,87.63 97.28,87.63 97.28,78.99 95.25,78.99 95.25,74.42 120.65,74.42 120.65,97.28
  pour Top (isolate 0.305): 95.25,97.28 95.25,92.71 97.28,92.71 97.28,90.17 98.3,90.17 98.3,87.63 97.28,87.63 97.28,78.99 95.25,78.99 95.25,74.42 120.65,74.42 120.65,97.28
PIO1
  Top 0.254: U2.19 42.58,24.04 43.18,24.64 44.45,24.64 JP4.6
PIO2
  Top 0.254: U1.19 10.83,24.04 11.43,24.64 12.7,24.64 JP2.6
PIO3
  Top 0.254: U1.20 9.63,24.11 JP2.5
PIO4
  Top 0.254: U1.22 7.23,25.03 JP2.3
PIO5
  Top 0.254: U1.21 8.43,25.45 JP2.4
PIO6
  Top 0.254: U1.3 7.23,8.14 8.51,6.86 10.16,6.86 JP1.6
PIO7
  Top 0.254: U1.4 8.43,7.95 8.89,7.49 12.06,7.49 JP1.5
PIO8
  Top 0.254: U2.20 41.38,24.11 JP4.5
PIO9
  Top 0.254: U2.22 38.98,25.03 JP4.3
PIO10
  Top 0.254: U1.33 5.71,15.11 3.81,13.21 3.81,8.13 JP1.8
PIO11  (via drill 0.51)
  Top 0.254: U1.34 v8.89,13.84
  Bottom 0.254: v8.89,13.84 5.71,13.84 3.81,11.94 JP1.9
PIO12
  Top 0.254: U2.21 40.18,25.45 JP4.4
PIO13
  Top 0.254: U2.3 38.98,8.14 40.26,6.86 41.91,6.86 JP3.6
PIO14
  Top 0.254: U2.4 40.18,7.95 40.64,7.49 43.81,7.49 JP3.5
PIO15
  Top 0.254: U2.33 37.47,15.11 35.56,13.21 35.56,8.13 JP3.8
PIO16  (via drill 0.51)
  Top 0.254: U2.34 v40.64,13.84
  Bottom 0.254: v40.64,13.84 37.47,13.84 35.56,11.94 JP3.9
PIO17
  Top 0.254: U3.19 74.33,24.04 74.93,24.64 76.2,24.64 JP6.6
PIO18
  Top 0.254: U3.20 73.13,24.11 JP6.5
PIO19
  Top 0.254: U3.22 70.73,25.03 JP6.3
PIO20
  Top 0.254: U3.21 71.93,25.45 JP6.4
PIO21
  Top 0.254: U3.3 70.73,8.14 72.01,6.86 73.66,6.86 JP5.6
PIO22
  Top 0.254: U3.4 71.93,7.95 72.39,7.49 75.56,7.49 JP5.5
PIO23
  Top 0.254: U3.33 69.22,15.11 67.31,13.21 67.31,8.13 JP5.8
PIO24  (via drill 0.51)
  Top 0.254: U3.34 v72.39,13.84
  Bottom 0.254: v72.39,13.84 69.22,13.84 67.31,11.94 JP5.9
PIO25
  Top 0.254: U4.19 106.08,24.04 106.68,24.64 107.95,24.64 JP8.6
PIO26
  Top 0.254: U4.20 104.88,24.11 JP8.5
PIO27
  Top 0.254: U4.22 102.48,25.03 JP8.3
PIO28
  Top 0.254: U4.21 103.68,25.45 JP8.4
PIO29
  Top 0.254: U4.3 102.48,8.14 103.76,6.86 105.41,6.86 JP7.6
PIO30
  Top 0.254: U4.4 103.68,7.95 104.14,7.49 107.31,7.49 JP7.5
PIO31
  Top 0.254: U4.33 100.97,15.11 99.06,13.21 99.06,8.13 JP7.8
PIO32  (via drill 0.51)
  Top 0.254: U4.34 v104.14,13.84
  Bottom 0.254: v104.14,13.84 100.97,13.84 99.06,11.94 JP7.9
PIO33
  Top 0.254: U5.19 10.83,47.41 11.43,48.01 12.7,48.01 JP10.6
PIO34
  Top 0.254: U5.20 9.63,47.48 JP10.5
PIO35
  Top 0.254: U5.22 7.23,48.4 JP10.3
PIO36
  Top 0.254: U5.21 8.43,48.82 JP10.4
PIO37
  Top 0.254: U5.3 7.23,31.51 8.51,30.23 10.16,30.23 JP9.6
PIO38
  Top 0.254: U5.4 8.43,31.32 8.89,30.86 12.06,30.86 JP9.5
PIO39
  Top 0.254: U5.33 5.71,38.48 3.81,36.58 3.81,31.5 JP9.8
PIO40  (via drill 0.51)
  Top 0.254: U5.34 v8.89,37.21
  Bottom 0.254: v8.89,37.21 5.71,37.21 3.81,35.31 JP9.9
PIO41
  Top 0.254: U6.19 42.58,47.41 43.18,48.01 44.45,48.01 JP12.6
PIO42
  Top 0.254: U6.20 41.38,47.48 JP12.5
PIO43
  Top 0.254: U6.22 38.98,48.4 JP12.3
PIO44
  Top 0.254: U6.21 40.18,48.82 JP12.4
PIO45
  Top 0.254: U6.3 38.98,31.51 40.26,30.23 41.91,30.23 JP11.6
PIO46
  Top 0.254: U6.4 40.18,31.32 40.64,30.86 43.81,30.86 JP11.5
PIO47
  Top 0.254: U6.33 37.47,38.48 35.56,36.58 35.56,31.5 JP11.8
PIO48  (via drill 0.51)
  Top 0.254: U6.34 v40.64,37.21
  Bottom 0.254: v40.64,37.21 37.47,37.21 35.56,35.31 JP11.9
PIO49
  Top 0.254: U7.19 74.33,47.41 74.93,48.01 76.2,48.01 JP14.6
PIO50
  Top 0.254: U7.20 73.13,47.48 JP14.5
PIO51
  Top 0.254: U7.22 70.73,48.4 JP14.3
PIO52
  Top 0.254: U7.21 71.93,48.82 JP14.4
PIO53
  Top 0.254: U7.3 70.73,31.51 72.01,30.23 73.66,30.23 JP13.6
PIO54
  Top 0.254: U7.4 71.93,31.32 72.39,30.86 75.56,30.86 JP13.5
PIO55
  Top 0.254: U7.33 69.22,38.48 67.31,36.58 67.31,31.5 JP13.8
PIO56  (via drill 0.51)
  Top 0.254: U7.34 v72.39,37.21
  Bottom 0.254: v72.39,37.21 69.22,37.21 67.31,35.31 JP13.9
PIO57
  Top 0.254: U8.19 106.08,47.41 106.68,48.01 107.95,48.01 JP16.6
PIO58
  Top 0.254: U8.20 104.88,47.48 JP16.5
PIO59
  Top 0.254: U8.22 102.48,48.4 JP16.3
PIO60
  Top 0.254: U8.21 103.68,48.82 JP16.4
PIO61
  Top 0.254: U8.3 102.48,31.51 103.76,30.23 105.41,30.23 JP15.6
PIO62
  Top 0.254: U8.4 103.68,31.32 104.14,30.86 107.31,30.86 JP15.5
PIO63
  Top 0.254: U8.33 100.97,38.48 99.06,36.58 99.06,31.5 JP15.8
PIO64  (via drill 0.51)
  Top 0.254: U8.34 v104.14,37.21
  Bottom 0.254: v104.14,37.21 100.97,37.21 99.06,35.31 JP15.9
PIO65
  Top 0.254: U9.19 10.83,70.77 11.43,71.37 12.7,71.37 JP18.6
PIO66
  Top 0.254: U9.20 9.63,70.84 JP18.5
PIO67
  Top 0.254: U9.22 7.23,71.76 JP18.3
PIO68
  Top 0.254: U9.21 8.43,72.18 JP18.4
PIO69
  Top 0.254: U9.3 7.23,54.87 8.51,53.59 10.16,53.59 JP17.6
PIO70
  Top 0.254: U9.4 8.43,54.69 8.89,54.23 12.06,54.23 JP17.5
PIO71
  Top 0.254: U9.33 5.71,61.85 3.81,59.94 3.81,54.86 JP17.8
PIO72  (via drill 0.51)
  Top 0.254: U9.34 v8.89,60.58
  Bottom 0.254: v8.89,60.58 5.71,60.58 3.81,58.67 JP17.9
PIO73
  Top 0.254: U10.19 42.58,70.77 43.18,71.37 44.45,71.37 JP20.6
PIO74
  Top 0.254: U10.20 41.38,70.84 JP20.5
PIO75
  Top 0.254: U10.22 38.98,71.76 JP20.3
PIO76
  Top 0.254: U10.21 40.18,72.18 JP20.4
PIO77
  Top 0.254: U10.3 38.98,54.87 40.26,53.59 41.91,53.59 JP19.6
PIO78
  Top 0.254: U10.4 40.18,54.69 40.64,54.23 43.81,54.23 JP19.5
PIO79
  Top 0.254: U10.33 37.47,61.85 35.56,59.94 35.56,54.86 JP19.8
PIO80  (via drill 0.51)
  Top 0.254: U10.34 v40.64,60.58
  Bottom 0.254: v40.64,60.58 37.47,60.58 35.56,58.67 JP19.9
PIO81
  Top 0.254: U11.19 74.33,70.77 74.93,71.37 76.2,71.37 JP22.6
PIO82
  Top 0.254: U11.20 73.13,70.84 JP22.5
PIO83
  Top 0.254: U11.22 70.73,71.76 JP22.3
PIO84
  Top 0.254: U11.21 71.93,72.18 JP22.4
PIO85
  Top 0.254: U11.3 70.73,54.87 72.01,53.59 73.66,53.59 JP21.6
PIO86
  Top 0.254: U11.4 71.93,54.69 72.39,54.23 75.56,54.23 JP21.5
PIO87
  Top 0.254: U11.33 69.22,61.85 67.31,59.94 67.31,54.86 JP21.8
PIO88  (via drill 0.51)
  Top 0.254: U11.34 v72.39,60.58
  Bottom 0.254: v72.39,60.58 69.22,60.58 67.31,58.67 JP21.9
PIO89
  Top 0.254: U12.19 106.08,70.77 106.68,71.37 107.95,71.37 JP24.6
PIO90
  Top 0.254: U12.20 104.88,70.84 JP24.5
PIO91
  Top 0.254: U12.22 102.48,71.76 JP24.3
PIO92
  Top 0.254: U12.21 103.68,72.18 JP24.4
PIO93
  Top 0.254: U12.3 102.48,54.87 103.76,53.59 105.41,53.59 JP23.6
PIO94
  Top 0.254: U12.4 103.68,54.69 104.14,54.23 107.31,54.23 JP23.5
PIO95
  Top 0.254: U12.33 100.97,61.85 99.06,59.94 99.06,54.86 JP23.8
PIO96  (via drill 0.51)
  Top 0.254: U12.34 v104.14,60.58
  Bottom 0.254: v104.14,60.58 100.97,60.58 99.06,58.67 JP23.9
PIO97
  Top 0.254: U13.19 10.83,94.14 11.43,94.74 12.7,94.74 JP26.6
PIO98
  Top 0.254: U13.20 9.63,94.21 JP26.5
PIO99
  Top 0.254: U13.22 7.23,95.13 JP26.3
PIO100
  Top 0.254: U13.21 8.43,95.55 JP26.4
PIO101
  Top 0.254: U13.3 7.23,78.24 8.51,76.96 10.16,76.96 JP25.6
PIO102
  Top 0.254: U13.4 8.43,78.06 8.89,77.6 12.06,77.6 JP25.5
PIO103
  Top 0.254: U13.33 5.71,85.22 3.81,83.31 3.81,78.23 JP25.8
PIO104  (via drill 0.51)
  Top 0.254: U13.34 v8.89,83.95
  Bottom 0.254: v8.89,83.95 5.71,83.95 3.81,82.04 JP25.9
PIO105
  Top 0.254: U14.19 42.58,94.14 43.18,94.74 44.45,94.74 JP28.6
PIO106
  Top 0.254: U14.20 41.38,94.21 JP28.5
PIO107
  Top 0.254: U14.22 38.98,95.13 JP28.3
PIO108
  Top 0.254: U14.21 40.18,95.55 JP28.4
PIO109
  Top 0.254: U14.3 38.98,78.24 40.26,76.96 41.91,76.96 JP27.6
PIO110
  Top 0.254: U14.4 40.18,78.06 40.64,77.6 43.81,77.6 JP27.5
PIO111
  Top 0.254: U14.33 37.47,85.22 35.56,83.31 35.56,78.23 JP27.8
PIO112  (via drill 0.51)
  Top 0.254: U14.34 v40.64,83.95
  Bottom 0.254: v40.64,83.95 37.47,83.95 35.56,82.04 JP27.9
PIO113
  Top 0.254: U15.19 74.33,94.14 74.93,94.74 76.2,94.74 JP30.6
PIO114
  Top 0.254: U15.20 73.13,94.21 JP30.5
PIO115
  Top 0.254: U15.22 70.73,95.13 JP30.3
PIO116
  Top 0.254: U15.21 71.93,95.55 JP30.4
PIO117
  Top 0.254: U15.3 70.73,78.24 72.01,76.96 73.66,76.96 JP29.6
PIO118
  Top 0.254: U15.4 71.93,78.06 72.39,77.6 75.56,77.6 JP29.5
PIO119
  Top 0.254: U15.33 69.22,85.22 67.31,83.31 67.31,78.23 JP29.8
PIO120  (via drill 0.51)
  Top 0.254: U15.34 v72.39,83.95
  Bottom 0.254: v72.39,83.95 69.22,83.95 67.31,82.04 JP29.9
PIO121
  Top 0.254: U16.19 106.08,94.14 106.68,94.74 107.95,94.74 JP32.6
PIO122
  Top 0.254: U16.20 104.88,94.21 JP32.5
PIO123
  Top 0.254: U16.22 102.48,95.13 JP32.3
PIO124
  Top 0.254: U16.21 103.68,95.55 JP32.4
PIO125
  Top 0.254: U16.3 102.48,78.24 103.76,76.96 105.41,76.96 JP31.6
PIO126
  Top 0.254: U16.4 103.68,78.06 104.14,77.6 107.31,77.6 JP31.5
PIO127
  Top 0.254: U16.33 100.97,85.22 99.06,83.31 99.06,78.23 JP31.8
PIO128  (via drill 0.51)
  Top 0.254: U16.34 v104.14,83.95
  Bottom 0.254: v104.14,83.95 100.97,83.95 99.06,82.04 JP31.9
RESET  (via drill 0.51)
  Top 0.254: U1.5 9.63,10.65 10.16,11.18 v17.53,11.18
  Bottom 0.254: v17.53,11.18 19.05,9.65 JP1.3
RESET1  (via drill 0.51)
  Top 0.254: U2.5 41.38,10.65 41.91,11.18 v49.28,11.18
  Bottom 0.254: v49.28,11.18 50.8,9.65 JP3.3
RESET2  (via drill 0.51)
  Top 0.254: U3.5 73.13,10.65 73.66,11.18 v81.03,11.18
  Bottom 0.254: v81.03,11.18 82.55,9.65 JP5.3
RESET3  (via drill 0.51)
  Top 0.254: U4.5 104.88,10.65 105.41,11.18 v112.78,11.18
  Bottom 0.254: v112.78,11.18 114.3,9.65 JP7.3
RESET4  (via drill 0.51)
  Top 0.254: U5.5 9.63,34.01 10.16,34.54 v17.53,34.54
  Bottom 0.254: v17.53,34.54 19.05,33.02 JP9.3
RESET5  (via drill 0.51)
  Top 0.254: U6.5 41.38,34.01 41.91,34.54 v49.28,34.54
  Bottom 0.254: v49.28,34.54 50.8,33.02 JP11.3
RESET6  (via drill 0.51)
  Top 0.254: U7.5 73.13,34.01 73.66,34.54 v81.03,34.54
  Bottom 0.254: v81.03,34.54 82.55,33.02 JP13.3
RESET7  (via drill 0.51)
  Top 0.254: U8.5 104.88,34.01 105.41,34.54 v112.78,34.54
  Bottom 0.254: v112.78,34.54 114.3,33.02 JP15.3
RESET8  (via drill 0.51)
  Top 0.254: U9.5 9.63,57.38 10.16,57.91 v17.53,57.91
  Bottom 0.254: v17.53,57.91 19.05,56.39 JP17.3
RESET9  (via drill 0.51)
  Top 0.254: U10.5 41.38,57.38 41.91,57.91 v49.28,57.91
  Bottom 0.254: v49.28,57.91 50.8,56.39 JP19.3
RESET10  (via drill 0.51)
  Top 0.254: U11.5 73.13,57.38 73.66,57.91 v81.03,57.91
  Bottom 0.254: v81.03,57.91 82.55,56.39 JP21.3
RESET11  (via drill 0.51)
  Top 0.254: U12.5 104.88,57.38 105.41,57.91 v112.78,57.91
  Bottom 0.254: v112.78,57.91 114.3,56.39 JP23.3
RESET12  (via drill 0.51)
  Top 0.254: U13.5 9.63,80.75 10.16,81.28 v17.53,81.28
  Bottom 0.254: v17.53,81.28 19.05,79.76 JP25.3
RESET13  (via drill 0.51)
  Top 0.254: U14.5 41.38,80.75 41.91,81.28 v49.28,81.28
  Bottom 0.254: v49.28,81.28 50.8,79.76 JP27.3
RESET14  (via drill 0.51)
  Top 0.254: U15.5 73.13,80.75 73.66,81.28 v81.03,81.28
  Bottom 0.254: v81.03,81.28 82.55,79.76 JP29.3
RESET15  (via drill 0.51)
  Top 0.254: U16.5 104.88,80.75 105.41,81.28 v112.78,81.28
  Bottom 0.254: v112.78,81.28 114.3,79.76 JP31.3
SPICLK
  Top 0.254: U1.6 10.83,8.22 11.05,8 14.1,8 JP1.4
SPICLK1
  Top 0.254: U2.6 42.58,8.22 42.8,8 45.85,8 JP3.4
SPICLK2
  Top 0.254: U3.6 74.33,8.22 74.55,8 77.6,8 JP5.4
SPICLK3
  Top 0.254: U4.6 106.08,8.22 106.3,8 109.35,8 JP7.4
SPICLK4
  Top 0.254: U5.6 10.83,31.59 11.05,31.37 14.1,31.37 JP9.4
SPICLK5
  Top 0.254: U6.6 42.58,31.59 42.8,31.37 45.85,31.37 JP11.4
SPICLK6
  Top 0.254: U7.6 74.33,31.59 74.55,31.37 77.6,31.37 JP13.4
SPICLK7
  Top 0.254: U8.6 106.08,31.59 106.3,31.37 109.35,31.37 JP15.4
SPICLK8
  Top 0.254: U9.6 10.83,54.96 11.05,54.74 14.1,54.74 JP17.4
SPICLK9
  Top 0.254: U10.6 42.58,54.96 42.8,54.74 45.85,54.74 JP19.4
SPICLK10
  Top 0.254: U11.6 74.33,54.96 74.55,54.74 77.6,54.74 JP21.4
SPICLK11
  Top 0.254: U12.6 106.08,54.96 106.3,54.74 109.35,54.74 JP23.4
SPICLK12
  Top 0.254: U13.6 10.83,78.32 11.05,78.11 14.1,78.11 JP25.4
SPICLK13
  Top 0.254: U14.6 42.58,78.32 42.8,78.11 45.85,78.11 JP27.4
SPICLK14
  Top 0.254: U15.6 74.33,78.32 74.55,78.11 77.6,78.11 JP29.4
SPICLK15
  Top 0.254: U16.6 106.08,78.32 106.3,78.11 109.35,78.11 JP31.4
SPICSB
  Top 0.254: U1.23 6.03,23.69 JP2.2
SPICSB1
  Top 0.254: U2.23 37.78,23.69 JP4.2
SPICSB2
  Top 0.254: U3.23 69.53,23.69 JP6.2
SPICSB3
  Top 0.254: U4.23 101.28,23.69 JP8.2
SPICSB4
  Top 0.254: U5.23 6.03,47.06 JP10.2
SPICSB5
  Top 0.254: U6.23 37.78,47.06 JP12.2
SPICSB6
  Top 0.254: U7.23 69.53,47.06 JP14.2
SPICSB7
  Top 0.254: U8.23 101.28,47.06 JP16.2
SPICSB8
  Top 0.254: U9.23 6.03,70.42 JP18.2
SPICSB9
  Top 0.254: U10.23 37.78,70.42 JP20.2
SPICSB10
  Top 0.254: U11.23 69.53,70.42 JP22.2
SPICSB11
  Top 0.254: U12.23 101.28,70.42 JP24.2
SPICSB12
  Top 0.254: U13.23 6.03,93.79 JP26.2
SPICSB13
  Top 0.254: U14.23 37.78,93.79 JP28.2
SPICSB14
  Top 0.254: U15.23 69.53,93.79 JP30.2
SPICSB15
  Top 0.254: U16.23 101.28,93.79 JP32.2
SPIMISO
  Top 0.254: U1.24 4.83,23.62 3.81,24.64 2.54,24.64 JP2.1
SPIMISO1
  Top 0.254: U2.24 36.58,23.62 35.56,24.64 34.29,24.64 JP4.1
SPIMISO2
  Top 0.254: U3.24 68.33,23.62 67.31,24.64 66.04,24.64 JP6.1
SPIMISO3
  Top 0.254: U4.24 100.08,23.62 99.06,24.64 97.79,24.64 JP8.1
SPIMISO4
  Top 0.254: U5.24 4.83,46.99 3.81,48.01 2.54,48.01 JP10.1
SPIMISO5
  Top 0.254: U6.24 36.58,46.99 35.56,48.01 34.29,48.01 JP12.1
SPIMISO6
  Top 0.254: U7.24 68.33,46.99 67.31,48.01 66.04,48.01 JP14.1
SPIMISO7
  Top 0.254: U8.24 100.08,46.99 99.06,48.01 97.79,48.01 JP16.1
SPIMISO8
  Top 0.254: U9.24 4.83,70.35 3.81,71.37 2.54,71.37 JP18.1
SPIMISO9
  Top 0.254: U10.24 36.58,70.35 35.56,71.37 34.29,71.37 JP20.1
SPIMISO10
  Top 0.254: U11.24 68.33,70.35 67.31,71.37 66.04,71.37 JP22.1
SPIMISO11
  Top 0.254: U12.24 100.08,70.35 99.06,71.37 97.79,71.37 JP24.1
SPIMISO12
  Top 0.254: U13.24 4.83,93.72 3.81,94.74 2.54,94.74 JP26.1
SPIMISO13
  Top 0.254: U14.24 36.58,93.72 35.56,94.74 34.29,94.74 JP28.1
SPIMISO14
  Top 0.254: U15.24 68.33,93.72 67.31,94.74 66.04,94.74 JP30.1
SPIMISO15
  Top 0.254: U16.24 100.08,93.72 99.06,94.74 97.79,94.74 JP32.1
SPIMOSI
  Top 0.254: U1.2 6.03,7.18 6.35,6.86 7.62,6.86 JP1.7
SPIMOSI1
  Top 0.254: U2.2 37.78,7.18 38.1,6.86 39.37,6.86 JP3.7
SPIMOSI2
  Top 0.254: U3.2 69.53,7.18 69.85,6.86 71.12,6.86 JP5.7
SPIMOSI3
  Top 0.254: U4.2 101.28,7.18 101.6,6.86 102.87,6.86 JP7.7
SPIMOSI4
  Top 0.254: U5.2 6.03,30.55 6.35,30.23 7.62,30.23 JP9.7
SPIMOSI5
  Top 0.254: U6.2 37.78,30.55 38.1,30.23 39.37,30.23 JP11.7
SPIMOSI6
  Top 0.254: U7.2 69.53,30.55 69.85,30.23 71.12,30.23 JP13.7
SPIMOSI7
  Top 0.254: U8.2 101.28,30.55 101.6,30.23 102.87,30.23 JP15.7
SPIMOSI8
  Top 0.254: U9.2 6.03,53.91 6.35,53.59 7.62,53.59 JP17.7
SPIMOSI9
  Top 0.254: U10.2 37.78,53.91 38.1,53.59 39.37,53.59 JP19.7
SPIMOSI10
  Top 0.254: U11.2 69.53,53.91 69.85,53.59 71.12,53.59 JP21.7
SPIMOSI11
  Top 0.254: U12.2 101.28,53.91 101.6,53.59 102.87,53.59 JP23.7
SPIMOSI12
  Top 0.254: U13.2 6.03,77.28 6.35,76.96 7.62,76.96 JP25.7
SPIMOSI13
  Top 0.254: U14.2 37.78,77.28 38.1,76.96 39.37,76.96 JP27.7
SPIMOSI14
  Top 0.254: U15.2 69.53,77.28 69.85,76.96 71.12,76.96 JP29.7
SPIMOSI15
  Top 0.254: U16.2 101.28,77.28 101.6,76.96 102.87,76.96 JP31.7
UARTCTS
  Top 0.254: U1.16 14.43,23.83 JP2.7
UARTCTS1
  Top 0.254: U2.16 46.18,23.83 JP4.7
UARTCTS2
  Top 0.254: U3.16 77.93,23.83 JP6.7
UARTCTS3
  Top 0.254: U4.16 109.68,23.83 JP8.7
UARTCTS4
  Top 0.254: U5.16 14.43,47.2 JP10.7
UARTCTS5
  Top 0.254: U6.16 46.18,47.2 JP12.7
UARTCTS6
  Top 0.254: U7.16 77.93,47.2 JP14.7
UARTCTS7
  Top 0.254: U8.16 109.68,47.2 JP16.7
UARTCTS8
  Top 0.254: U9.16 14.43,70.56 JP18.7
UARTCTS9
  Top 0.254: U10.16 46.18,70.56 JP20.7
UARTCTS10
  Top 0.254: U11.16 77.93,70.56 JP22.7
UARTCTS11
  Top 0.254: U12.16 109.68,70.56 JP24.7
UARTCTS12
  Top 0.254: U13.16 14.43,93.93 JP26.7
UARTCTS13
  Top 0.254: U14.16 46.18,93.93 JP28.7
UARTCTS14
  Top 0.254: U15.16 77.93,93.93 JP30.7
UARTCTS15
  Top 0.254: U16.16 109.68,93.93 JP32.7
UARTRTS
  Top 0.254: U1.15 15.63,23.76 16.51,24.64 17.78,24.64 JP2.8
UARTRTS1
  Top 0.254: U2.15 47.38,23.76 48.26,24.64 49.53,24.64 JP4.8
UARTRTS2
  Top 0.254: U3.15 79.13,23.76 80.01,24.64 81.28,24.64 JP6.8
UARTRTS3
  Top 0.254: U4.15 110.88,23.76 111.76,24.64 113.03,24.64 JP8.8
UARTRTS4
  Top 0.254: U5.15 15.63,47.13 16.51,48.01 17.78,48.01 JP10.8
UARTRTS5
  Top 0.254: U6.15 47.38,47.13 48.26,48.01 49.53,48.01 JP12.8
UARTRTS6
  Top 0.254: U7.15 79.13,47.13 80.01,48.01 81.28,48.01 JP14.8
UARTRTS7
  Top 0.254: U8.15 110.88,47.13 111.76,48.01 113.03,48.01 JP16.8
UARTRTS8
  Top 0.254: U9.15 15.63,70.49 16.51,71.37 17.78,71.37 JP18.8
UARTRTS9
  Top 0.254: U10.15 47.38,70.49 48.26,71.37 49.53,71.37 JP20.8
UARTRTS10
  Top 0.254: U11.15 79.13,70.49 80.01,71.37 81.28,71.37 JP22.8
UARTRTS11
  Top 0.254: U12.15 110.88,70.49 111.76,71.37 113.03,71.37 JP24.8
UARTRTS12
  Top 0.254: U13.15 15.63,93.86 16.51,94.74 17.78,94.74 JP26.8
UARTRTS13
  Top 0.254: U14.15 47.38,93.86 48.26,94.74 49.53,94.74 JP28.8
UARTRTS14
  Top 0.254: U15.15 79.13,93.86 80.01,94.74 81.28,94.74 JP30.8
UARTRTS15
  Top 0.254: U16.15 110.88,93.86 111.76,94.74 113.03,94.74 JP32.8
UARTRX
  Top 0.254: U1.13 20.57,22.35 JP2.10
UARTRX1
  Top 0.254: U2.13 52.32,22.35 JP4.10
UARTRX2
  Top 0.254: U3.13 84.07,22.35 JP6.10
UARTRX3
  Top 0.254: U4.13 115.82,22.35 JP8.10
UARTRX4
  Top 0.254: U5.13 20.57,45.72 JP10.10
UARTRX5
  Top 0.254: U6.13 52.32,45.72 JP12.10
UARTRX6
  Top 0.254: U7.13 84.07,45.72 JP14.10
UARTRX7
  Top 0.254: U8.13 115.82,45.72 JP16.10
UARTRX8
  Top 0.254: U9.13 20.57,69.08 JP18.10
UARTRX9
  Top 0.254: U10.13 52.32,69.08 JP20.10
UARTRX10
  Top 0.254: U11.13 84.07,69.08 JP22.10
UARTRX11
  Top 0.254: U12.13 115.82,69.08 JP24.10
UARTRX12
  Top 0.254: U13.13 20.57,92.45 JP26.10
UARTRX13
  Top 0.254: U14.13 52.32,92.45 JP28.10
UARTRX14
  Top 0.254: U15.13 84.07,92.45 JP30.10
UARTRX15
  Top 0.254: U16.13 115.82,92.45 JP32.10
UARTTX
  Top 0.254: U1.14 16.83,23.56 17.27,24 19.68,24 JP2.9
UARTTX1
  Top 0.254: U2.14 48.58,23.56 49.02,24 51.44,24 JP4.9
UARTTX2
  Top 0.254: U3.14 80.33,23.56 80.77,24 83.19,24 JP6.9
UARTTX3
  Top 0.254: U4.14 112.08,23.56 112.52,24 114.94,24 JP8.9
UARTTX4
  Top 0.254: U5.14 16.83,46.93 17.27,47.37 19.68,47.37 JP10.9
UARTTX5
  Top 0.254: U6.14 48.58,46.93 49.02,47.37 51.44,47.37 JP12.9
UARTTX6
  Top 0.254: U7.14 80.33,46.93 80.77,47.37 83.19,47.37 JP14.9
UARTTX7
  Top 0.254: U8.14 112.08,46.93 112.52,47.37 114.94,47.37 JP16.9
UARTTX8
  Top 0.254: U9.14 16.83,70.3 17.27,70.74 19.68,70.74 JP18.9
UARTTX9
  Top 0.254: U10.14 48.58,70.3 49.02,70.74 51.44,70.74 JP20.9
UARTTX10
  Top 0.254: U11.14 80.33,70.3 80.77,70.74 83.19,70.74 JP22.9
UARTTX11
  Top 0.254: U12.14 112.08,70.3 112.52,70.74 114.94,70.74 JP24.9
UARTTX12
  Top 0.254: U13.14 16.83,93.66 17.27,94.11 19.68,94.11 JP26.9
UARTTX13
  Top 0.254: U14.14 48.58,93.66 49.02,94.11 51.44,94.11 JP28.9
UARTTX14
  Top 0.254: U15.14 80.33,93.66 80.77,94.11 83.19,94.11 JP30.9
UARTTX15
  Top 0.254: U16.14 112.08,93.66 112.52,94.11 114.94,94.11 JP32.9
VCC
  Top 0.203: C2.A 23.5,15.9 23.47,15.9 | C2.A 23.47,16 | C2.A
  Top 0.254: 23.62,16 23.75,16 24.64,15.11 24.64,9.91 24.13,9.4 24.13,6.86 | 23.62,16 C2.A | 24.13,6.86 JP1.1 | 24.13,6.86 17.78,6.86 16.83,7.81 U1.11 | 23.62,16 | 23.62,16 C2.A | C1.1 23.5,16.13 23.62,16
VCC1
  Top 0.203: C4.A 55.24,15.9 55.22,15.9 | C4.A 55.22,16 | C4.A
  Top 0.254: 55.37,16 55.5,16 56.39,15.11 56.39,9.91 55.88,9.4 55.88,6.86 | 55.37,16 C4.A | 55.88,6.86 JP3.1 | 55.88,6.86 49.53,6.86 48.58,7.81 U2.11 | 55.37,16 | 55.37,16 C4.A | C3.1 55.24,16.13 55.37,16
VCC2
  Top 0.203: C6.A 87,15.9 86.97,15.9 | C6.A 86.97,16 | C6.A
  Top 0.254: 87.12,16 87.25,16 88.14,15.11 88.14,9.91 87.63,9.4 87.63,6.86 | 87.12,16 C6.A | 87.63,6.86 JP5.1 | 87.63,6.86 81.28,6.86 80.33,7.81 U3.11 | 87.12,16 | 87.12,16 C6.A | C5.1 87,16.13 87.12,16
VCC3
  Top 0.203: C8.A 118.75,15.9 118.72,15.9 | C8.A 118.72,16 | C8.A
  Top 0.254: 118.87,16 119,16 119.89,15.11 119.89,9.91 119.38,9.4 119.38,6.86 | 118.87,16 C8.A | 119.38,6.86 JP7.1 | 119.38,6.86 113.03,6.86 112.08,7.81 U4.11 | 118.87,16 | 118.87,16 C8.A | C7.1 118.75,16.13 118.87,16
VCC4
  Top 0.203: C10.A 23.5,39.27 23.47,39.27 | C10.A 23.47,39.37 | C10.A
  Top 0.254: 23.62,39.37 23.75,39.37 24.64,38.48 24.64,33.27 24.13,32.77 24.13,30.23 | 23.62,39.37 C10.A | 24.13,30.23 JP9.1 | 24.13,30.23 17.78,30.23 16.83,31.18 U5.11 | 23.62,39.37 | 23.62,39.37 C10.A | C9.1 23.5,39.5 23.62,39.37
VCC5
  Top 0.203: C12.A 55.24,39.27 55.22,39.27 | C12.A 55.22,39.37 | C12.A
  Top 0.254: 55.37,39.37 55.5,39.37 56.39,38.48 56.39,33.27 55.88,32.77 55.88,30.23 | 55.37,39.37 C12.A | 55.88,30.23 JP11.1 | 55.88,30.23 49.53,30.23 48.58,31.18 U6.11 | 55.37,39.37 | 55.37,39.37 C12.A | C11.1 55.24,39.5 55.37,39.37
VCC6
  Top 0.203: C14.A 87,39.27 86.97,39.27 | C14.A 86.97,39.37 | C14.A
  Top 0.254: 87.12,39.37 87.25,39.37 88.14,38.48 88.14,33.27 87.63,32.77 87.63,30.23 | 87.12,39.37 C14.A | 87.63,30.23 JP13.1 | 87.63,30.23 81.28,30.23 80.33,31.18 U7.11 | 87.12,39.37 | 87.12,39.37 C14.A | C13.1 87,39.5 87.12,39.37
VCC7
  Top 0.203: C16.A 118.75,39.27 118.72,39.27 | C16.A 118.72,39.37 | C16.A
  Top 0.254: 118.87,39.37 119,39.37 119.89,38.48 119.89,33.27 119.38,32.77 119.38,30.23 | 118.87,39.37 C16.A | 119.38,30.23 JP15.1 | 119.38,30.23 113.03,30.23 112.08,31.18 U8.11 | 118.87,39.37 | 118.87,39.37 C16.A | C15.1 118.75,39.5 118.87,39.37
VCC8
  Top 0.203: C18.A 23.5,62.64 23.47,62.64 | C18.A 23.47,62.74 | C18.A
  Top 0.254: 23.62,62.74 23.75,62.74 24.64,61.85 24.64,56.64 24.13,56.13 24.13,53.59 | 23.62,62.74 C18.A | 24.13,53.59 JP17.1 | 24.13,53.59 17.78,53.59 16.83,54.54 U9.11 | 23.62,62.74 | 23.62,62.74 C18.A | C17.1 23.5,62.86 23.62,62.74
VCC9
  Top 0.203: C20.A 55.24,62.64 55.22,62.64 | C20.A 55.22,62.74 | C20.A
  Top 0.254: 55.37,62.74 55.5,62.74 56.39,61.85 56.39,56.64 55.88,56.13 55.88,53.59 | 55.37,62.74 C20.A | 55.88,53.59 JP19.1 | 55.88,53.59 49.53,53.59 48.58,54.54 U10.11 | 55.37,62.74 | 55.37,62.74 C20.A | C19.1 55.24,62.86 55.37,62.74
VCC10
  Top 0.203: C22.A 87,62.64 86.97,62.64 | C22.A 86.97,62.74 | C22.A
  Top 0.254: 87.12,62.74 87.25,62.74 88.14,61.85 88.14,56.64 87.63,56.13 87.63,53.59 | 87.12,62.74 C22.A | 87.63,53.59 JP21.1 | 87.63,53.59 81.28,53.59 80.33,54.54 U11.11 | 87.12,62.74 | 87.12,62.74 C22.A | C21.1 87,62.86 87.12,62.74
VCC11
  Top 0.203: C24.A 118.75,62.64 118.72,62.64 | C24.A 118.72,62.74 | C24.A
  Top 0.254: 118.87,62.74 119,62.74 119.89,61.85 119.89,56.64 119.38,56.13 119.38,53.59 | 118.87,62.74 C24.A | 119.38,53.59 JP23.1 | 119.38,53.59 113.03,53.59 112.08,54.54 U12.11 | 118.87,62.74 | 118.87,62.74 C24.A | C23.1 118.75,62.86 118.87,62.74
VCC12
  Top 0.203: C26.A 23.5,86 23.47,86 | C26.A 23.47,86.11 | C26.A
  Top 0.254: 23.62,86.11 23.75,86.11 24.64,85.22 24.64,80.01 24.13,79.5 24.13,76.96 | 23.62,86.11 C26.A | 24.13,76.96 JP25.1 | 24.13,76.96 17.78,76.96 16.83,77.91 U13.11 | 23.62,86.11 | 23.62,86.11 C26.A | C25.1 23.5,86.23 23.62,86.11
VCC13
  Top 0.203: C28.A 55.24,86 55.22,86 | C28.A 55.22,86.11 | C28.A
  Top 0.254: 55.37,86.11 55.5,86.11 56.39,85.22 56.39,80.01 55.88,79.5 55.88,76.96 | 55.37,86.11 C28.A | 55.88,76.96 JP27.1 | 55.88,76.96 49.53,76.96 48.58,77.91 U14.11 | 55.37,86.11 | 55.37,86.11 C28.A | C27.1 55.24,86.23 55.37,86.11
VCC14
  Top 0.203: C30.A 87,86 86.97,86 | C30.A 86.97,86.11 | C30.A
  Top 0.254: 87.12,86.11 87.25,86.11 88.14,85.22 88.14,80.01 87.63,79.5 87.63,76.96 | 87.12,86.11 C30.A | 87.63,76.96 JP29.1 | 87.63,76.96 81.28,76.96 80.33,77.91 U15.11 | 87.12,86.11 | 87.12,86.11 C30.A | C29.1 87,86.23 87.12,86.11
VCC15
  Top 0.203: C32.A 118.75,86 118.72,86 | C32.A 118.72,86.11 | C32.A
  Top 0.254: 118.87,86.11 119,86.11 119.89,85.22 119.89,80.01 119.38,79.5 119.38,76.96 | 118.87,86.11 C32.A | 119.38,76.96 JP31.1 | 119.38,76.96 113.03,76.96 112.08,77.91 U16.11 | 118.87,86.11 | 118.87,86.11 C32.A | C31.1 118.75,86.23 118.87,86.11

## Text on the board
Bottom: v15 | v15 | v15 | v15 | v15 | v15 | v15 | v15 | v15 | v15 | v15 | v15 | v15 | v15 | v15 | v15
Dimension: Route Out | Route Out | Route Out | Route Out | Route Out | Route Out | Route Out | Route Out | Route Out | Route Out | Route Out | Route Out | Route Out | Route Out | Route Out
tPlace: TX | RX | TX | RX | TX | RX | TX | RX | GND | 3.3V | GND | 3.3V | GND | 3.3V | GND | 3.3V | TX | RX | TX | RX | TX | RX | TX | RX | GND | 3.3V | GND | 3.3V | GND | 3.3V | GND | 3.3V | TX | RX | TX | RX | TX | RX | TX | RX | GND | 3.3V | GND | 3.3V | GND | 3.3V | GND | 3.3V | TX | RX | TX | RX | TX | RX | TX | RX | GND | 3.3V | GND | 3.3V | GND | 3.3V | GND | 3.3V
bPlace: MISO | CS | PIO4 | PIO5 | PIO3 | PIO2 | CTS | RTS | MISO | CS | PIO4 | PIO5 | PIO3 | PIO2 | CTS | RTS | MISO | CS | PIO4 | PIO5 | PIO3 | PIO2 | CTS | RTS | MISO | CS | PIO4 | PIO5 | PIO3 | PIO2 | CTS | RTS | Bluetooth Module Breakout | Bluetooth Module Breakout | Bluetooth Module Breakout | Bluetooth Module Breakout | PIO11 | PIO10 | MOSI | PIO6 | PIO7 | CLK | RESET | PIO11 | PIO10 | MOSI | PIO6 | PIO7 | CLK | RESET | PIO11 | PIO10 | MOSI | PIO6 | PIO7 | CLK | RESET | PIO11 | PIO10 | MOSI | PIO6 | PIO7 | CLK | RESET | MISO | CS | PIO4 | PIO5 | PIO3 | PIO2 | CTS | RTS | MISO | CS | PIO4 | PIO5 | PIO3 | PIO2 | CTS | RTS | MISO | CS | PIO4 | PIO5 | PIO3 | PIO2 | CTS | RTS | MISO | CS | PIO4 | PIO5 | PIO3 | PIO2 | CTS | RTS | Bluetooth Module Breakout | Bluetooth Module Breakout | Bluetooth Module Breakout | Bluetooth Module Breakout | PIO11 | PIO10 | MOSI | PIO6 | PIO7 | CLK | RESET | PIO11 | PIO10 | MOSI | PIO6 | PIO7 | CLK | RESET | PIO11 | PIO10 | MOSI | PIO6 | PIO7 | CLK | RESET | PIO11 | PIO10 | MOSI | PIO6 | PIO7 | CLK | RESET | MISO | CS | PIO4 | PIO5 | PIO3 | PIO2 | CTS | RTS | MISO | CS | PIO4 | PIO5 | PIO3 | PIO2 | CTS | RTS | MISO | CS | PIO4 | PIO5 | PIO3 | PIO2 | CTS | RTS | MISO | CS | PIO4 | PIO5 | PIO3 | PIO2 | CTS | RTS | Bluetooth Module Breakout | Bluetooth Module Breakout | Bluetooth Module Breakout | Bluetooth Module Breakout | PIO11 | PIO10 | MOSI | PIO6 | PIO7 | CLK | RESET | PIO11 | PIO10 | MOSI | PIO6 | PIO7 | CLK | RESET | PIO11 | PIO10 | MOSI | PIO6 | PIO7 | CLK | RESET | PIO11 | PIO10 | MOSI | PIO6 | PIO7 | CLK | RESET | MISO | CS | PIO4 | PIO5 | PIO3 | PIO2 | CTS | RTS | MISO | CS | PIO4 | PIO5 | PIO3 | PIO2 | CTS | RTS | MISO | CS | PIO4 | PIO5 | PIO3 | PIO2 | CTS | RTS | MISO | CS | PIO4 | PIO5 | PIO3 | PIO2 | CTS | RTS | Bluetooth Module Breakout | Bluetooth Module Breakout | Bluetooth Module Breakout | Bluetooth Module Breakout | PIO11 | PIO10 | MOSI | PIO6 | PIO7 | CLK | RESET | PIO11 | PIO10 | MOSI | PIO6 | PIO7 | CLK | RESET | PIO11 | PIO10 | MOSI | PIO6 | PIO7 | CLK | RESET | PIO11 | PIO10 | MOSI | PIO6 | PIO7 | CLK | RESET